# Altium PCB PCB1.PcbDoc
Units mm, origin at the board's own origin, x right, y up, seen from the top; angles counter-clockwise.
Board outline 51.56 x 66.93 mm, 2 copper layers (Top Layer, Bottom Layer); 36 components, 19 nets, 108 pads, 12 vias.
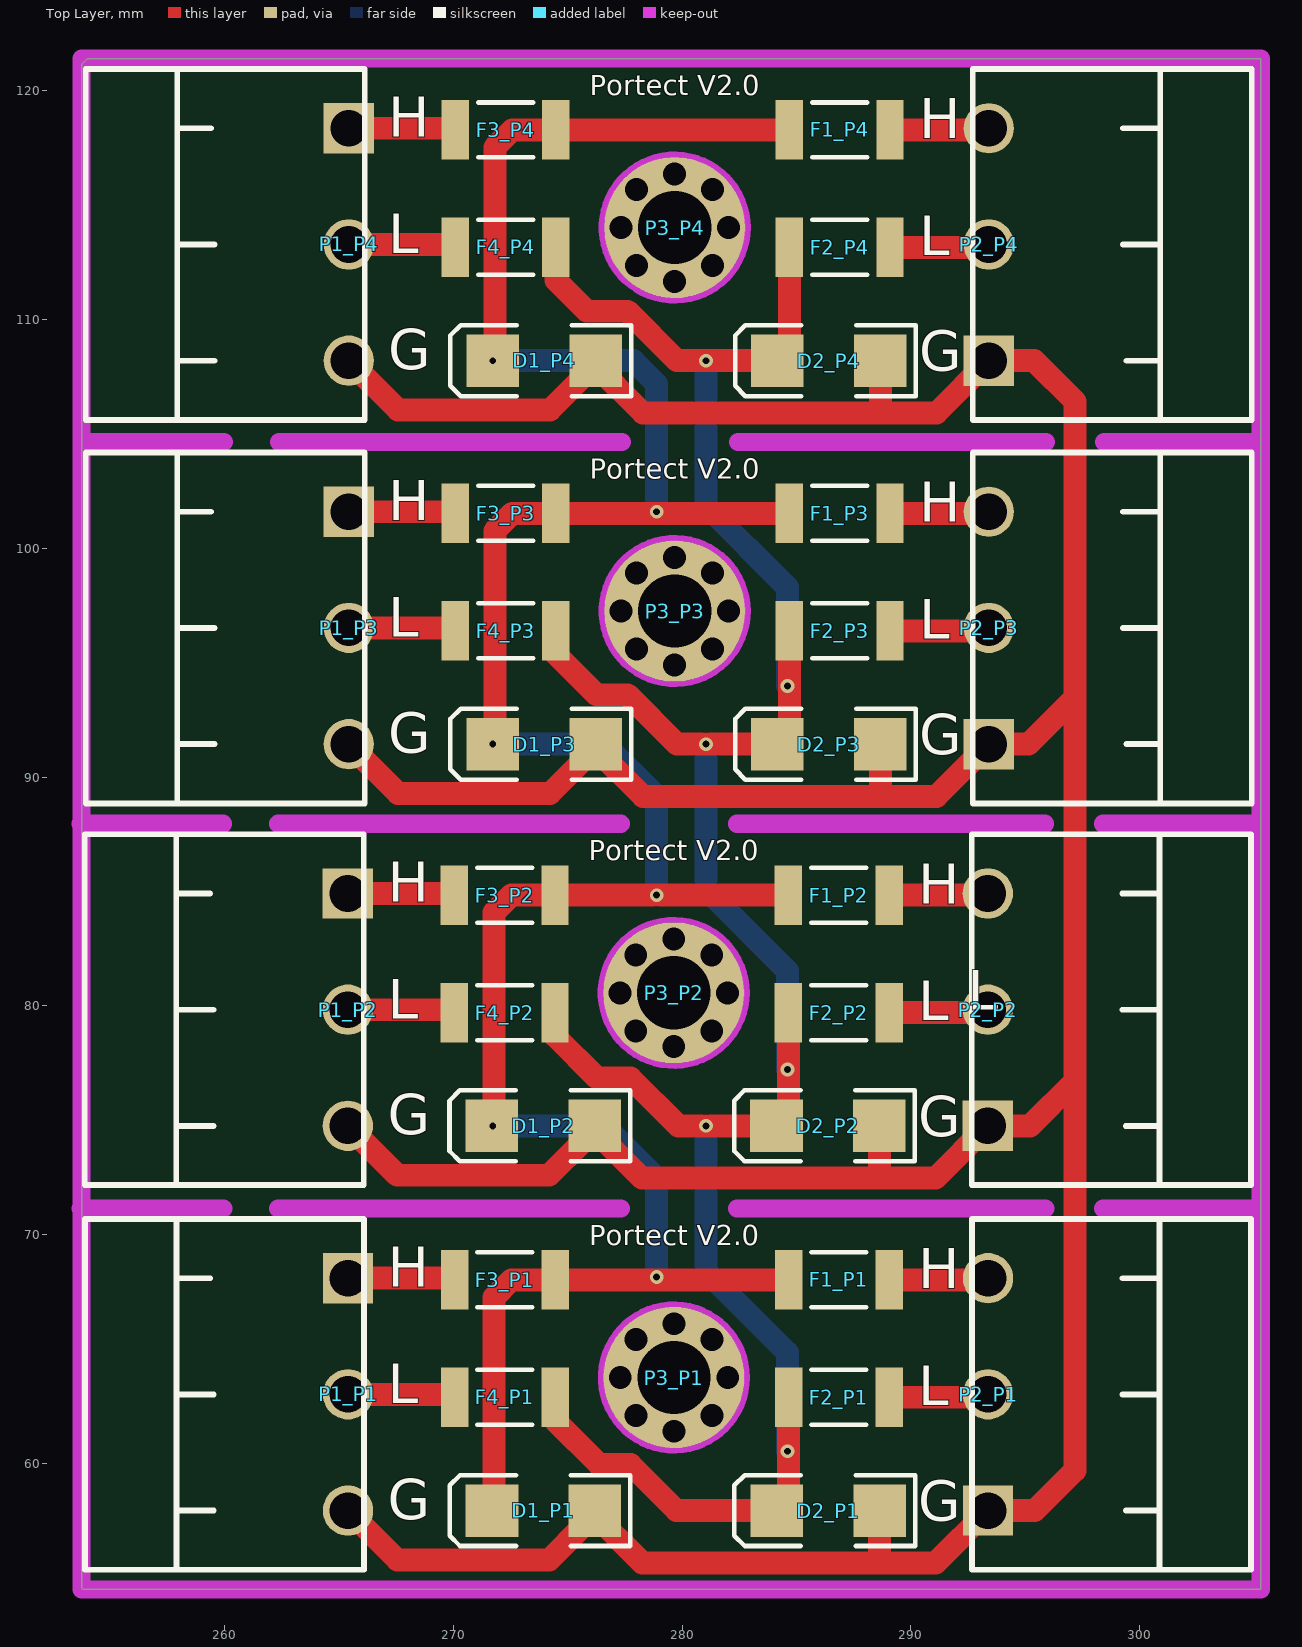
[diagram p0: Top Layer view]
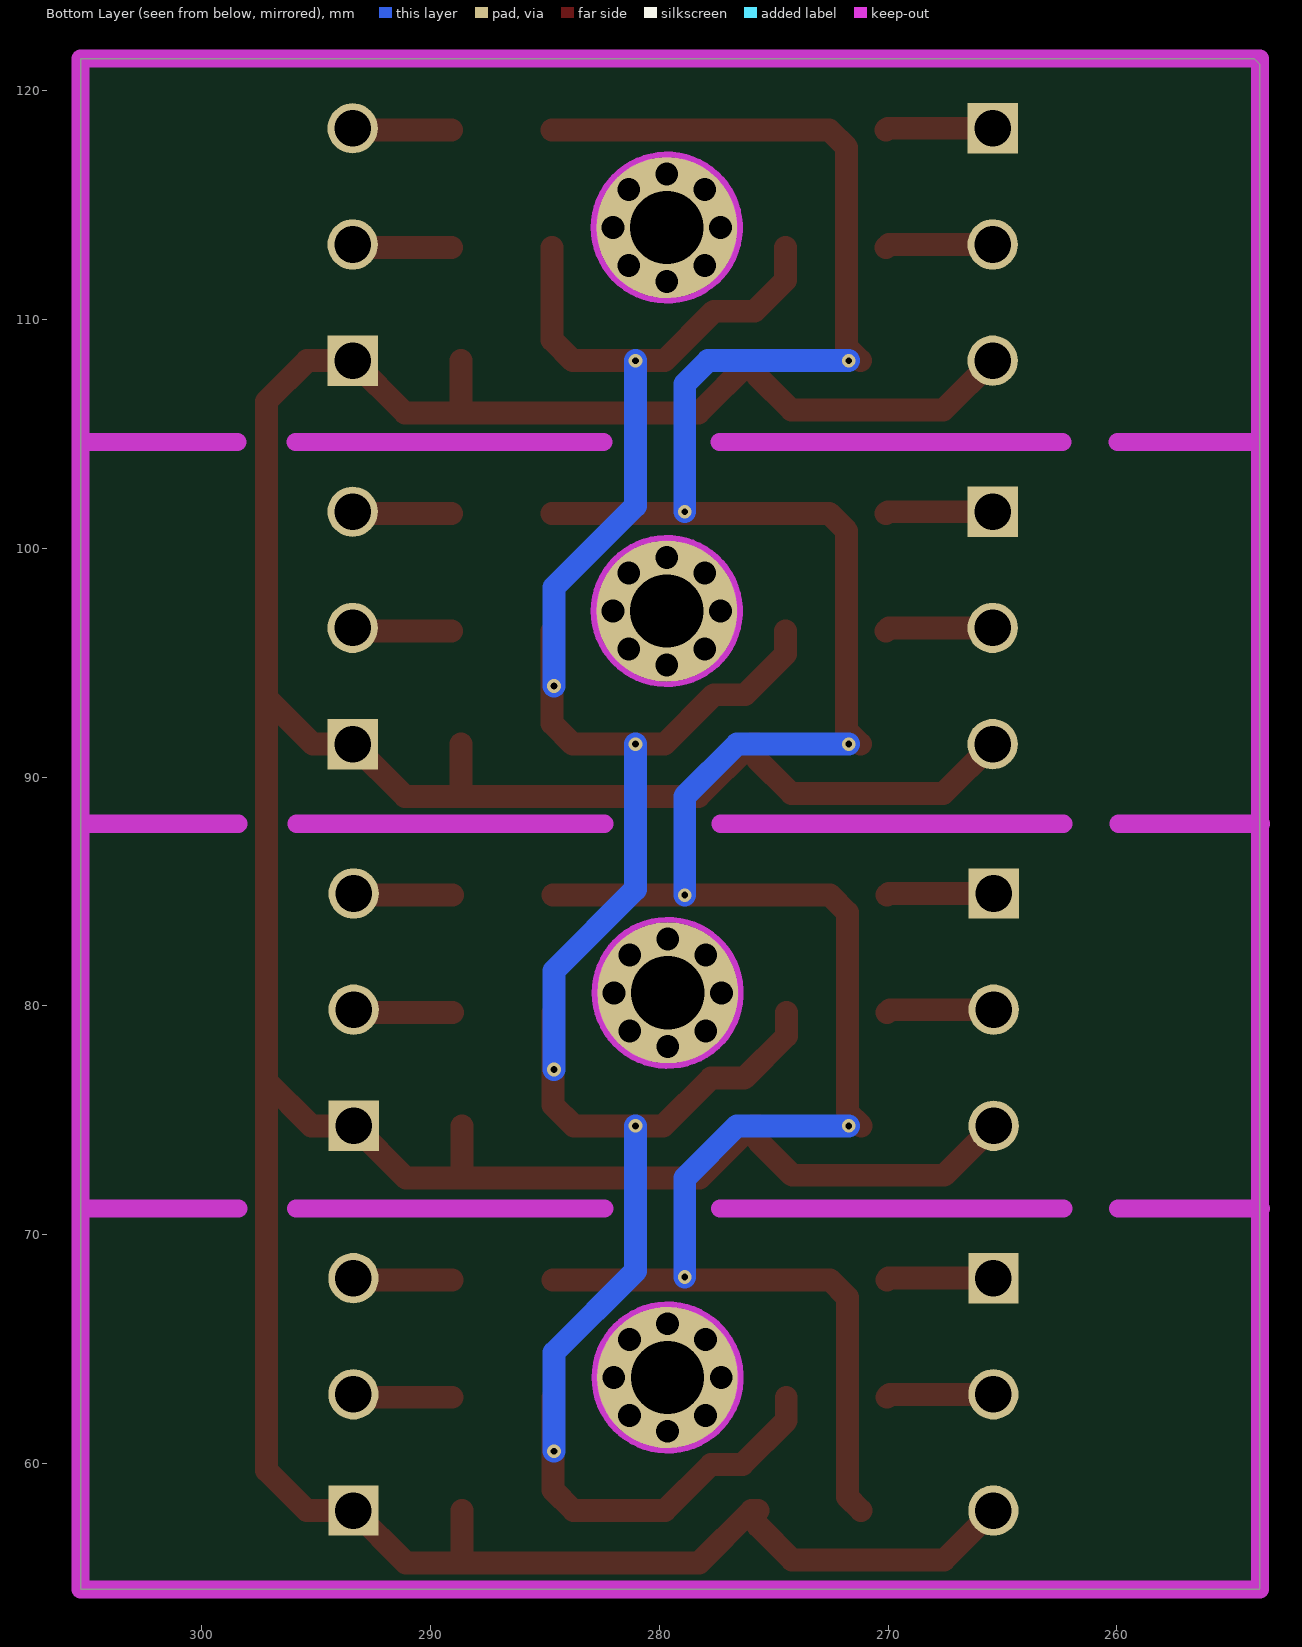
[diagram p1: Bottom Layer view, seen from below]

## Layer stack, top to bottom
Top Layer: signal copper 0.0356
Dielectric: dielectric 0.32, FR-4, Dk 4.8
Bottom Layer: signal copper 0.0356

## Board outline
253.746,54.483 253.746,121.158 254,121.412 305.308,121.412 305.308,54.483

## Design rules (kind name [scope] priority, off if disabled: settings)
Clearance [All] p1: gap=0.254
PolygonConnect [All] p1: connectstyle=Relief reliefconductorwidth=0.254 reliefentries=4 polygonreliefangle="90 Angle"
RoomDefinition P1 [InComponentClass('P1')] p1: confinementstyle=ConfineIn formatcopy=TRUE lockcomponents=FALSE outline 253.714,55.01 305.058,55.01 305.058,70.885 253.714,70.885
RoomDefinition P2 [InComponentClass('P2')] p2: confinementstyle=ConfineIn formatcopy=TRUE lockcomponents=FALSE outline 253.705,71.828 305.049,71.828 305.049,87.703 253.705,87.703
RoomDefinition P3 [InComponentClass('P3')] p3: confinementstyle=ConfineIn formatcopy=TRUE lockcomponents=FALSE outline 253.746,88.519 305.09,88.519 305.09,104.394 253.746,104.394
RoomDefinition P4 [InComponentClass('P4')] p4: confinementstyle=ConfineIn formatcopy=TRUE lockcomponents=FALSE outline 253.746,105.283 305.09,105.283 305.09,121.158 253.746,121.158
RoutingVias [All] p1: holewidth=0.711 width=1.27 viastyle="Through Hole" minholewidth=0.711 minwidth=1.27 maxholewidth=0.711 maxwidth=1.27
SilkscreenOverComponentPads [All] p1: minsilkscreentomaskgap=0.254
SolderMaskExpansion [All] p1: expansion=0.102
Width [All] p1: maxlimit=1.2 minlimit=0.254 preferedwidth=1
27 further rules are at their usual default settings.

## Classes and differential pairs
component class P4: D1_P4 D2_P4 F1_P4 F2_P4 F3_P4 F4_P4 P1_P4 P2_P4 P3_P4
component class P3: D1_P3 D2_P3 F1_P3 F2_P3 F3_P3 F4_P3 P1_P3 P2_P3 P3_P3
component class P2: D1_P2 D2_P2 F1_P2 F2_P2 F3_P2 F4_P2 P1_P2 P2_P2 P3_P2
channel class Mode1: FI1 FI2
component class P1: D1_P1 D2_P1 F1_P1 F2_P1 F3_P1 F4_P1 P1_P1 P2_P1 P3_P1

## Components (designator, comment, footprint, x,y, rotation, side; value= is the part's Value field where it differs from the comment)
D1_P1 "D Schottky" SMB 273.943,57.931 r180 top (schematic designator D1)
D1_P2 "D Schottky" SMB 273.934,74.749 r180 top (schematic designator D1)
D1_P3 "D Schottky" SMB 273.975,91.44 r180 top (schematic designator D1)
D1_P4 "D Schottky" SMB 273.975,108.204 r180 top (schematic designator D1)
D2_P1 "D Schottky" SMB 286.389,57.931 r180 top (schematic designator D2)
D2_P2 "D Schottky" SMB 286.38,74.749 r180 top (schematic designator D2)
D2_P3 "D Schottky" SMB 286.421,91.44 r180 top (schematic designator D2)
D2_P4 "D Schottky" SMB 286.421,108.204 r180 top (schematic designator D2)
F1_P1 "Fuse 2" 12Z-2010 286.861,68.018 r0 top (schematic designator F1)
F1_P2 "Fuse 2" 12Z-2010 286.852,84.836 r0 top (schematic designator F1)
F1_P3 "Fuse 2" 12Z-2010 286.893,101.527 r0 top (schematic designator F1)
F1_P4 "Fuse 2" 12Z-2010 286.893,118.291 r0 top (schematic designator F1)
F2_P1 "Fuse 2" 12Z-2010 286.861,62.884 r0 top (schematic designator F2)
F2_P2 "Fuse 2" 12Z-2010 286.852,79.702 r0 top (schematic designator F2)
F2_P3 "Fuse 2" 12Z-2010 286.893,96.393 r0 top (schematic designator F2)
F2_P4 "Fuse 2" 12Z-2010 286.893,113.157 r0 top (schematic designator F2)
F3_P1 "Fuse 2" 12Z-2010 272.256,68.018 r180 top (schematic designator F3)
F3_P2 "Fuse 2" 12Z-2010 272.247,84.836 r180 top (schematic designator F3)
F3_P3 "Fuse 2" 12Z-2010 272.288,101.527 r180 top (schematic designator F3)
F3_P4 "Fuse 2" 12Z-2010 272.288,118.291 r180 top (schematic designator F3)
F4_P1 "Fuse 2" 12Z-2010 272.256,62.884 r180 top (schematic designator F4)
F4_P2 "Fuse 2" 12Z-2010 272.247,79.702 r180 top (schematic designator F4)
F4_P3 "Fuse 2" 12Z-2010 272.288,96.393 r180 top (schematic designator F4)
F4_P4 "Fuse 2" 12Z-2010 272.288,113.157 r180 top (schematic designator F4)
P1_P1 "Header 3" DZ-3-5.08 265.398,68.091 r270 top (schematic designator P1)
P1_P2 "Header 3" DZ-3-5.08 265.389,84.909 r270 top (schematic designator P1)
P1_P3 "Header 3" DZ-3-5.08 265.43,101.6 r270 top (schematic designator P1)
P1_P4 "Header 3" DZ-3-5.08 265.43,118.364 r270 top (schematic designator P1)
P2_P1 "Header 3" DZ-3-5.08 293.379,57.931 r90 top (schematic designator P2)
P2_P2 "Header 3" DZ-3-5.08 293.37,74.749 r90 top (schematic designator P2)
P2_P3 "Header 3" DZ-3-5.08 293.411,91.44 r90 top (schematic designator P2)
P2_P4 "Header 3" DZ-3-5.08 293.411,108.204 r90 top (schematic designator P2)
P3_P1 "Plug" "定位孔 Φ3.2" 279.647,63.748 r0 top (schematic designator P3)
P3_P2 "Plug" "定位孔 Φ3.2" 279.638,80.566 r0 top (schematic designator P3)
P3_P3 "Plug" "定位孔 Φ3.2" 279.679,97.257 r0 top (schematic designator P3)
P3_P4 "Plug" "定位孔 Φ3.2" 279.679,114.021 r0 top (schematic designator P3)

## Footprints (in the part's own frame and the unit in brackets; to place one, negate y for a bottom-side part, rotate by r counter-clockwise, add the part's x,y. Pads: shape width x height; smd on the part's side, far side on the other; paste and mask are expansions set on the pad)
12Z-2010 [mm] "Chip Resistor, Body 5.0x2.5mm, IPC High Density"
  rect 1.2x2.6 smd: 1(-2.2,0) 2(2.2,0)
  silkscreen extent -1.2,-1.2 1.2,1.2, body extent -2.58,-1.33 2.58,1.33, height 0.9
DZ-3-5.08 [mm]
  rect 2.2x2.2 hole 1.6: 1(0,0)
  round 2.2 hole 1.6: 2(5.08,0) 3(10.16,0)
  silkscreen extent -2.59,-11.5 12.75,0.7
SMB [mm] "DO-214-AA/SMB; 2 C-Bend Leads; Body 5.3 x 3.6 mm, inc. leads (LxW)"
  rect 2.3x2.3 smd: 1(-2.25,0) 2(2.25,0)
  silkscreen extent -3.8,-1.55 4.1,1.55
"定位孔 Φ3.2" [mm]
  round 1 hole 1 unplated: 1(-2.35,0) 1(-1.662,-1.662) 1(-1.662,1.662) 1(0,-2.35) 1(0,2.35) 1(1.662,-1.662) 1(1.662,1.662) 1(2.35,0)
  round 6.2 hole 3.2: 1(0,0)
  Keep-Out Layer circle w0.254: c0,0 r3.2

## Part data
D1_P1 D1_P2 D1_P3 D1_P4 D2_P1 D2_P2 D2_P3 D2_P4: "Schottky Diode"
F1_P1 F1_P2 F1_P3 F1_P4 F2_P1 F2_P2 F2_P3 F2_P4 F3_P1 F3_P2 F3_P3 F3_P4 F4_P1 F4_P2 F4_P3 F4_P4: "Fuse"
P1_P1 P1_P2 P1_P3 P1_P4 P2_P1 P2_P2 P2_P3 P2_P4: "Header, 3-Pin"
P3_P1 P3_P2 P3_P3 P3_P4: "P"

## Via types
v1: diameter 0.6, hole 0.3, Top Layer to Bottom Layer, 12 vias

## Nets (pads, with @x,y where several pads share a name; then routed paths per layer and width w, separated by ;. In a path a pad name is that pad's centre, name@x,y a point inside that pad or via, vN(x,y) a via of type N, cw(c..) or ccw(c..) an arc to the next point about the centre after c; other vN are vias at no path point)
CAN_H_BUS_P1: D1_P1.2 D1_P2.2 D1_P3.2 D1_P4.2 F1_P1.1 F1_P2.1 F1_P3.1 F1_P4.1 F3_P1.1 F3_P2.1 F3_P3.1 F3_P4.1 | length 129.1
  Top Layer w1: D1_P2.2@271.176,74.749 271.775,75.348 271.775,84.074 272.537,84.836 F3_P2.1 F1_P2.1 ; D1_P1.2@271.185,57.931 271.784,58.53 271.784,67.256 272.546,68.018 F3_P1.1 F1_P1.1 ; D1_P3.2@271.217,91.44 271.816,92.039 271.816,100.765 272.578,101.527 F3_P3.1 F1_P3.1 ; D1_P4.2@271.217,108.204 271.816,108.803 271.816,117.529 272.578,118.291 F3_P4.1 F1_P4.1
  Bottom Layer w1: v1(271.725,74.749) 276.606,74.749 278.892,72.463 v1(278.892,68.145) ; v1(271.725,91.44) 276.606,91.44 278.892,89.154 v1(278.892,84.836) ; v1(271.725,108.204) 277.876,108.204 278.892,107.188 v1(278.892,101.6)
CAN_L_BUS_P1: D2_P1.2 D2_P2.2 D2_P3.2 D2_P4.2 F2_P1.1 F2_P2.1 F2_P3.1 F2_P4.1 F4_P1.1 F4_P2.1 F4_P3.1 F4_P4.1 | length 116.4
  Top Layer w1: F4_P2.1 274.447,78.681 276.293,76.835 277.749,76.835 279.835,74.749 283.749,74.749 284.652,75.652 F2_P2.1 ; F4_P1.1 274.456,61.863 276.375,59.944 277.749,59.944 279.762,57.931 283.758,57.931 284.661,58.834 F2_P1.1 ; F4_P3.1 274.488,95.372 276.261,93.599 277.622,93.599 279.781,91.44 283.79,91.44 284.693,92.343 F2_P3.1 ; F4_P4.1 274.488,111.719 275.844,110.363 277.622,110.363 279.781,108.204 283.79,108.204 284.693,109.107 F2_P4.1
  Bottom Layer w1: v1(281.051,74.749) 281.051,68.399 284.607,64.843 v1(284.607,60.525) ; v1(281.051,91.44) 281.051,85.09 284.607,81.534 v1(284.607,77.216) ; v1(281.051,108.204) 281.051,101.854 284.607,98.298 v1(284.607,93.98)
GND_P1: D1_P1.1 D1_P2.1 D1_P3.1 D1_P4.1 D2_P1.1 D2_P2.1 D2_P3.1 D2_P4.1 P1_P1.3 P1_P2.3 P1_P3.3 P1_P4.3 P2_P1.1 P2_P2.1 P2_P3.1 P2_P4.1 | length 199.7
  Top Layer w1: P1_P2.3 267.548,72.59 274.188,72.59 D1_P2.1@275.676,74.078 ; P1_P1.3 267.557,55.772 274.197,55.772 D1_P1.1@275.685,57.26 ; P1_P3.3 267.589,89.281 274.229,89.281 D1_P3.1@275.717,90.769 ; P1_P4.3 267.589,106.045 274.229,106.045 D1_P4.1@275.717,107.533 ; D1_P2.1@275.676,74.749 275.966,74.749 278.252,72.463 288.671,72.463 ; D1_P1.1@275.685,57.931 275.975,57.931 278.261,55.645 288.798,55.645 ; D1_P3.1@275.717,91.44 276.007,91.44 278.293,89.154 288.798,89.154 ; D1_P4.1@275.717,108.204 276.007,108.204 278.293,105.918 291.125,105.918 P2_P4.1 295.402,108.204 297.18,106.426 297.18,93.472 ; D2_P2.1 288.63,72.504 288.671,72.463 ; D2_P1.1 288.639,55.804 288.798,55.645 ; D2_P3.1 288.671,89.281 288.798,89.154 ; 288.671,106.045 D2_P4.1 ; 288.671,72.463 291.084,72.463 P2_P2.1 295.221,74.749 297.18,76.708 ; 288.798,55.645 291.093,55.645 P2_P1.1 295.421,57.931 297.18,59.69 297.18,76.708 ; 288.798,89.154 291.125,89.154 P2_P3.1 295.148,91.44 297.18,93.472 ; 297.18,76.708 297.18,93.472
NetF1_P1_2: F1_P1.2 P2_P1.3 | length 4.2
  Top Layer w1: F1_P1.2 P2_P1.3@293.306,68.018
NetF1_P2_2: F1_P2.2 P2_P2.3 | length 4.2
  Top Layer w1: F1_P2.2 P2_P2.3@293.297,84.836
NetF1_P3_2: F1_P3.2 P2_P3.3 | length 4.2
  Top Layer w1: F1_P3.2 P2_P3.3@293.338,101.527
NetF1_P4_2: F1_P4.2 P2_P4.3 | length 4.2
  Top Layer w1: F1_P4.2 P2_P4.3@293.338,118.291
NetF2_P1_2: F2_P1.2 P2_P1.2 | length 4.2
  Top Layer w1: F2_P1.2 P2_P1.2@293.252,62.884
NetF2_P2_2: F2_P2.2 P2_P2.2 | length 4.2
  Top Layer w1: F2_P2.2 P2_P2.2@293.243,79.702
NetF2_P3_2: F2_P3.2 P2_P3.2 | length 4.2
  Top Layer w1: F2_P3.2 P2_P3.2@293.284,96.393
NetF2_P4_2: F2_P4.2 P2_P4.2 | length 4.2
  Top Layer w1: F2_P4.2 P2_P4.2@293.284,113.157
NetF3_P1_2: F3_P1.2 P1_P1.1 | length 4.7
  Top Layer w1: P1_P1.1 269.983,68.091 F3_P1.2
NetF3_P2_2: F3_P2.2 P1_P2.1 | length 4.7
  Top Layer w1: P1_P2.1 269.974,84.909 F3_P2.2
NetF3_P3_2: F3_P3.2 P1_P3.1 | length 4.7
  Top Layer w1: P1_P3.1 270.015,101.6 F3_P3.2
NetF3_P4_2: F3_P4.2 P1_P4.1 | length 4.7
  Top Layer w1: P1_P4.1 270.015,118.364 F3_P4.2
NetF4_P1_2: F4_P1.2 P1_P1.2 | length 4.7
  Top Layer w1: P1_P1.2 269.929,63.011 F4_P1.2
NetF4_P2_2: F4_P2.2 P1_P2.2 | length 4.7
  Top Layer w1: P1_P2.2 269.92,79.829 F4_P2.2
NetF4_P3_2: F4_P3.2 P1_P3.2 | length 4.7
  Top Layer w1: P1_P3.2 269.961,96.52 F4_P3.2
NetF4_P4_2: F4_P4.2 P1_P4.2 | length 4.7
  Top Layer w1: P1_P4.2 269.961,113.284 F4_P4.2
pads on no net: P3_P1.1 P3_P2.1 P3_P3.1 P3_P4.1

## Keep-outs
Keep-Out Layer:
  lines w0.8: 253.705,87.957 259.928,87.957 ; 253.714,71.139 259.937,71.139 ; 253.746,104.648 259.969,104.648 ; 253.746,120.269 253.746,121.412 254.254,121.412 ; 253.746,121.158 253.746,55.042 253.746,54.483 305.308,54.483 305.308,121.412 254,121.412 ; 262.341,87.957 277.327,87.957 ; 262.35,71.139 277.336,71.139 ; 262.382,104.648 277.368,104.648 ; 282.407,87.957 295.869,87.957 ; 282.416,71.139 295.878,71.139 ; 282.448,104.648 295.91,104.648 ; 298.409,87.957 305.267,87.957 ; 298.418,71.139 305.276,71.139 ; 298.45,104.648 305.308,104.648

## Silkscreen, mask and mechanical layers (free items; w line width, h text height)
Top Overlay:
  text "Portect V2.0" at 275.971,119.507 h1.5
  text "H" at 267.167,117.403 h3
  text "H" at 290.367,117.33 h3
  text "L" at 267.167,112.323 h3
  text "L" at 290.367,112.25 h3
  text "G" at 267.167,107.243 h3
  text "G" at 290.367,107.17 h3
  text "Portect V2.0" at 275.971,102.743 h1.5
  text "H" at 267.167,100.639 h3
  text "H" at 290.367,100.566 h3
  text "L" at 267.167,95.559 h3
  text "L" at 290.367,95.486 h3
  text "G" at 267.167,90.479 h3
  text "G" at 290.367,90.406 h3
  text "Portect V2.0" at 275.93,86.052 h1.5
  text "H" at 267.126,83.948 h3
  text "H" at 290.326,83.875 h3
  text "L" at 292.486,79.248 h3
  text "L" at 267.126,78.868 h3
  text "L" at 290.326,78.795 h3
  text "G" at 267.126,73.788 h3
  text "G" at 290.326,73.715 h3
  text "Portect V2.0" at 275.939,69.234 h1.5
  text "H" at 267.135,67.13 h3
  text "H" at 290.335,67.057 h3
  text "L" at 267.135,62.05 h3
  text "L" at 290.335,61.977 h3
  text "G" at 267.135,56.97 h3
  text "G" at 290.335,56.897 h3